# Altium PCB 1.PcbDoc (part 1 of 3)
Units mm, origin at the board's own origin, x right, y up, seen from the top; angles counter-clockwise.
Board outline 233.04 x 114.81 mm, 2 copper layers (Top Layer, Bottom Layer); 326 components, 324 nets, 1073 pads, 126 vias.
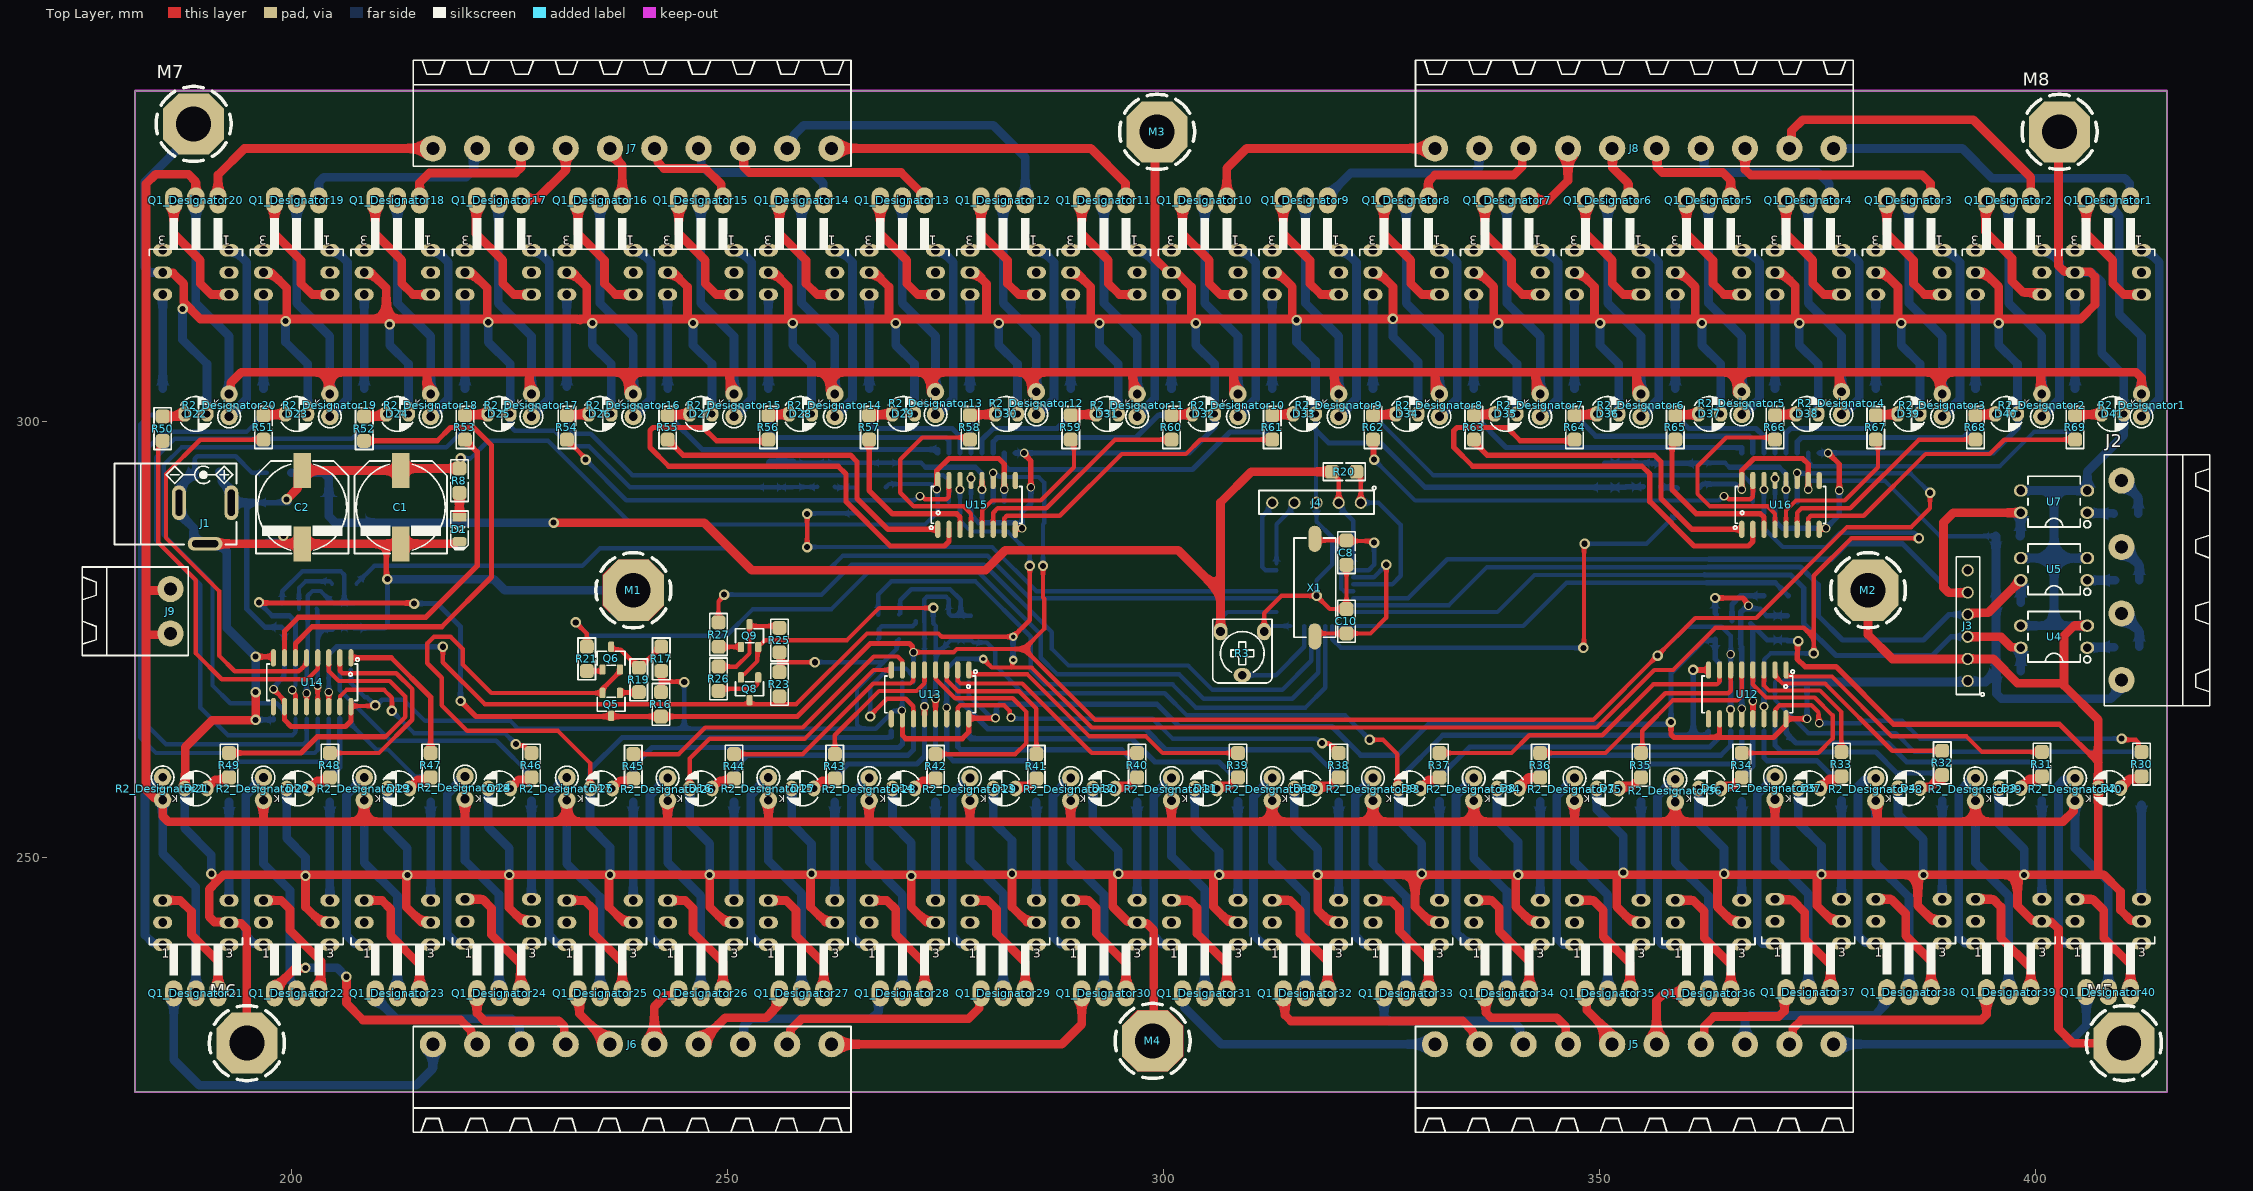
[diagram p0: Top Layer view]
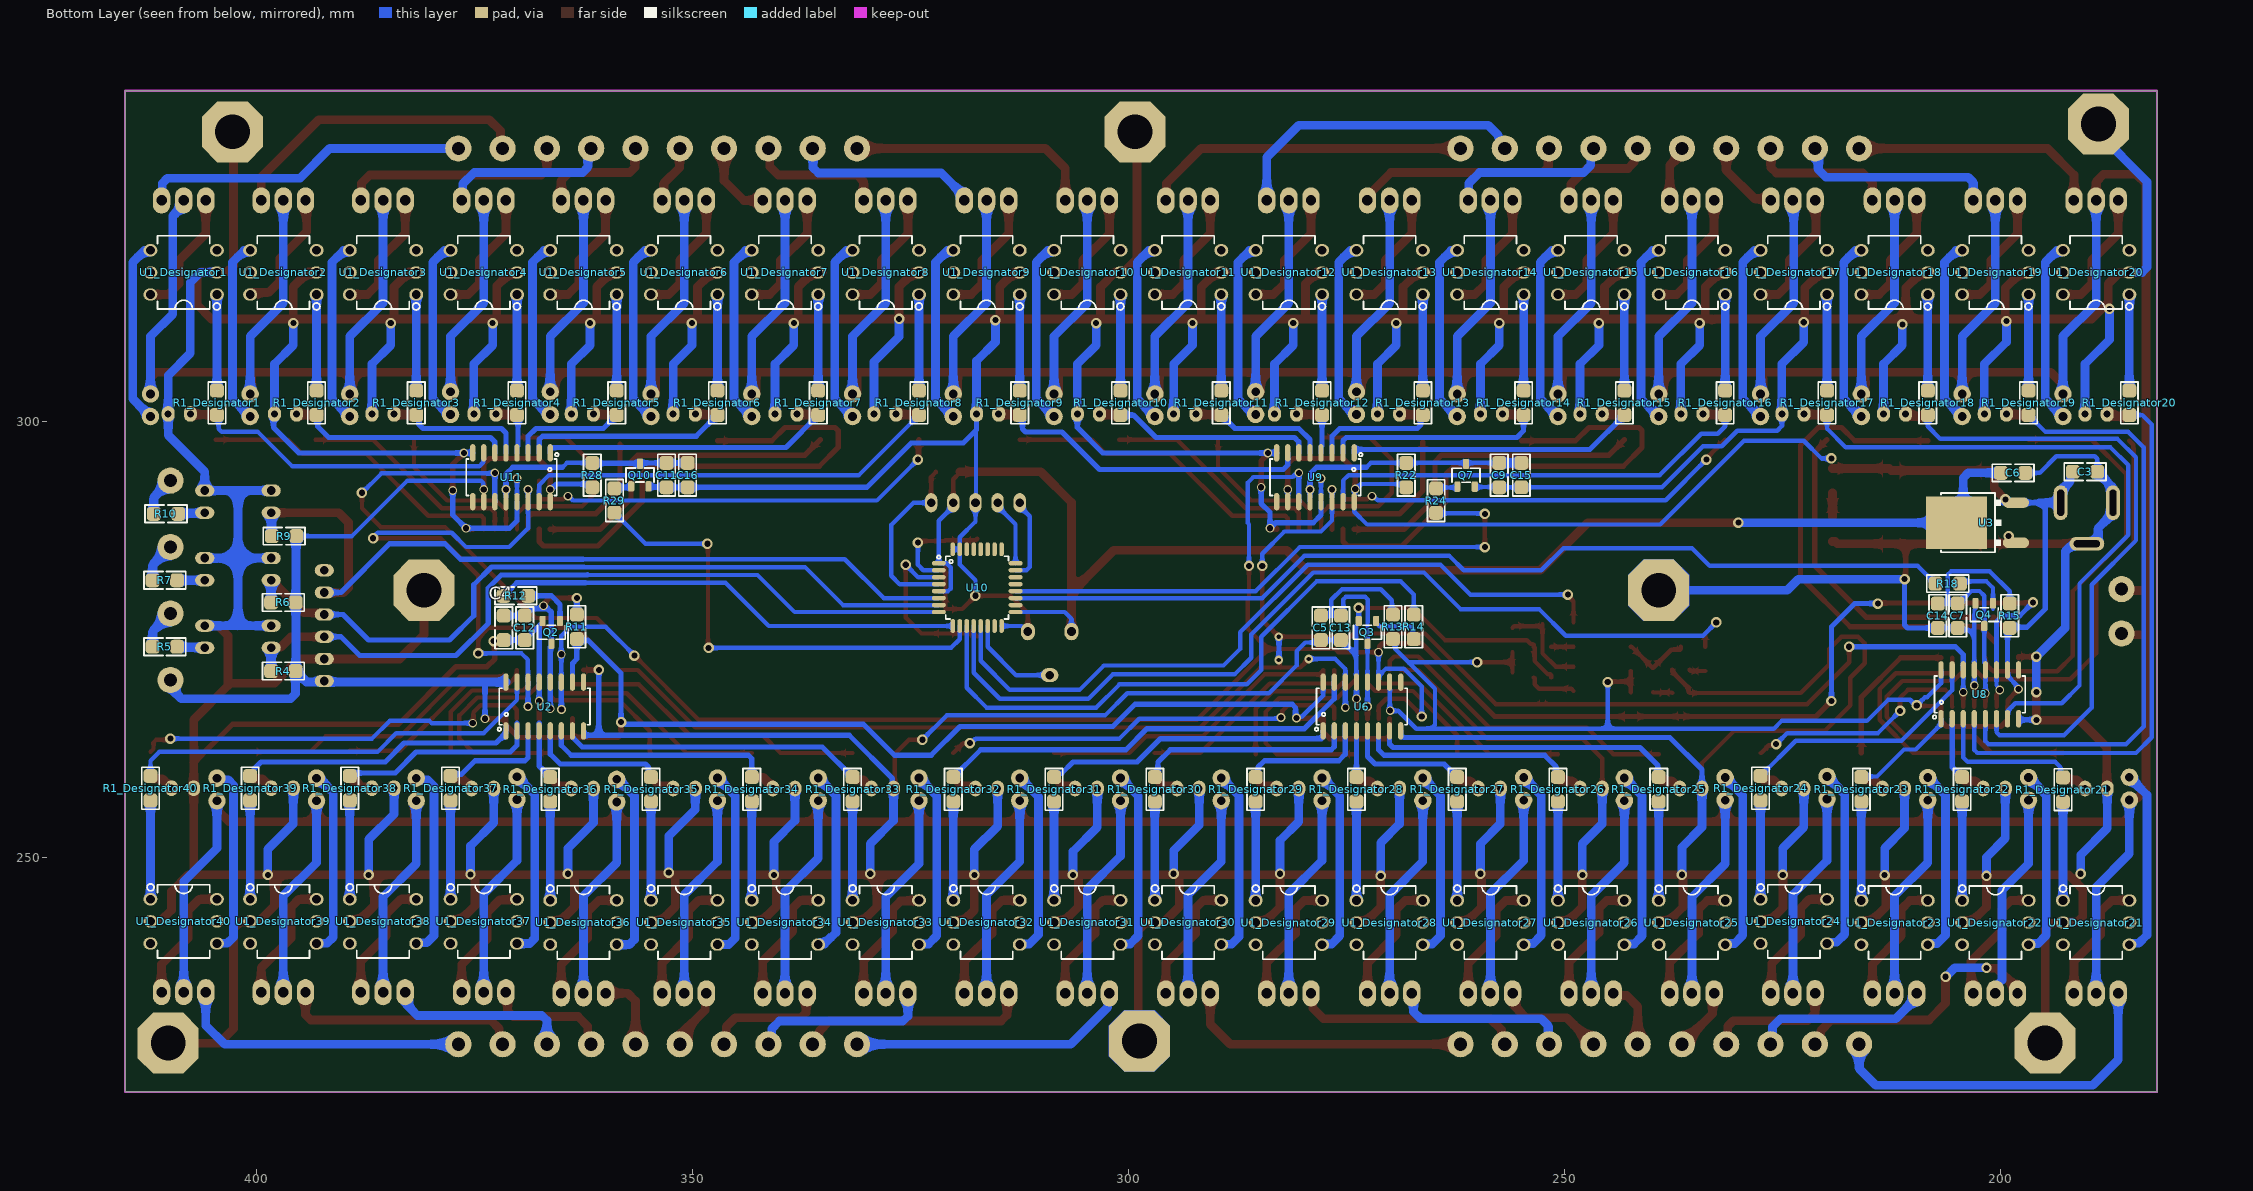
[diagram p1: Bottom Layer view, seen from below]

## Layer stack, top to bottom
Top Solder: solder mask 0.0102, Solder Resist, Dk 3.5
Top Layer: signal copper 0.0356
Dielectric 1: dielectric 0.32, FR-4, Dk 4.8
Bottom Layer: signal copper 0.0356
Bottom Solder: solder mask 0.0102, Solder Resist, Dk 3.5

## Board outline
181.991,223.139 181.991,337.947 415.036,337.947 415.036,223.139

## Design rules (kind name [scope] priority, off if disabled: settings)
Clearance [All] p1: gap=0.3 ignorepadtopadclearanceinfootprint=FALSE
PolygonConnect [All] p1: connectstyle=Relief reliefconductorwidth=0.254 reliefentries=4 polygonreliefangle="90 Angle" airgapwidth=0.254
RoutingVias [All] p1: holewidth=0.5 width=1 viastyle="Through Hole" minholewidth=0.5 minwidth=1 maxholewidth=0.5 maxwidth=1
SolderMaskExpansion [All] p1: expansion=0.102 istentingtop=FALSE
SupplyNets "Schematic Supply Nets_2" [InNet('+5')] p1: voltage=0.000
SupplyNets "Schematic Supply Nets_1" [InNet('GND')] p2: voltage=0.000
SupplyNets "Schematic Supply Nets" [InNet('3.3V')] p3: voltage=0.000
Width [All] p1: maxlimit=1 minlimit=0.5 preferedwidth=0.6
30 further rules are at their usual default settings.

## Classes and differential pairs
channel class Channel: Designator1 Designator2 Designator3 Designator4 Designator5 Designator6 Designator7 Designator8 Designator9 Designator10 Designator11 Designator12 Designator13 Designator14 Designator15 Designator16 Designator17 Designator18 Designator19 Designator20 Designator21 Designator22 Designator23 Designator24 Designator25 Designator26 Designator27 Designator28 Designator29 Designator30 Designator31 Designator32 Designator33 Designator34 Designator35 Designator36 Designator37 Designator38 Designator39 Designator40
component class MainSchematic: C1 C2 C3 C4 C5 C6 C7 C8 C9 C10 C11 C12 C13 C14 C15 C16 D1 D2 D3 D4 D5 D6 D7 D8 D9 D10 D11 D12 D13 D14 D15 D16 D17 D18 D19 D20 D21 D22 D23 D24 D25 D26 D27 D28 D29 D30 D31 D32 D33 D34 D35 D36 D37 D38 D39 D40 D41 J1 J2 J3 J4 J5 J6 J7 J8 J9 M1 M2 M3 M4 M5 M6 M7 M8 Q2 Q3 Q4 Q5 Q6 Q7 Q8 Q9 Q10 R3 R4 R5 R6 R7 R8 R9 R10 R11 R12 R13 R14 R15 R16 R17 R18 R19 R20 R21 R22 R23 R24 R25 R26 R27 R28 R29 R30 R31 R32 R33 R34 R35 R36 R37 R38 R39 R40 R41 R42 R43 R44 R45 R46 R47 R48 R49 R50 R51 R52 R53 R54 R55 R56 R57 R58 R59 R60 R61 R62 R63 R64 R65 R66 R67 R68 R69 tp U2 U3 U4 U5 U6 U7 U8 U9 U10 U11 U12 U13 U14 U15 U16 X1
component class Designator40: Q1_Designator40 R1_Designator40 R2_Designator40 U1_Designator40
component class Designator39: Q1_Designator39 R1_Designator39 R2_Designator39 U1_Designator39
component class Designator38: Q1_Designator38 R1_Designator38 R2_Designator38 U1_Designator38
component class Designator37: Q1_Designator37 R1_Designator37 R2_Designator37 U1_Designator37
component class Designator36: Q1_Designator36 R1_Designator36 R2_Designator36 U1_Designator36
component class Designator35: Q1_Designator35 R1_Designator35 R2_Designator35 U1_Designator35
component class Designator34: Q1_Designator34 R1_Designator34 R2_Designator34 U1_Designator34
component class Designator33: Q1_Designator33 R1_Designator33 R2_Designator33 U1_Designator33
component class Designator32: Q1_Designator32 R1_Designator32 R2_Designator32 U1_Designator32
component class Designator31: Q1_Designator31 R1_Designator31 R2_Designator31 U1_Designator31
component class Designator30: Q1_Designator30 R1_Designator30 R2_Designator30 U1_Designator30
component class Designator29: Q1_Designator29 R1_Designator29 R2_Designator29 U1_Designator29
component class Designator28: Q1_Designator28 R1_Designator28 R2_Designator28 U1_Designator28
component class Designator27: Q1_Designator27 R1_Designator27 R2_Designator27 U1_Designator27
component class Designator26: Q1_Designator26 R1_Designator26 R2_Designator26 U1_Designator26
component class Designator25: Q1_Designator25 R1_Designator25 R2_Designator25 U1_Designator25
component class Designator24: Q1_Designator24 R1_Designator24 R2_Designator24 U1_Designator24
component class Designator23: Q1_Designator23 R1_Designator23 R2_Designator23 U1_Designator23
component class Designator22: Q1_Designator22 R1_Designator22 R2_Designator22 U1_Designator22
component class Designator21: Q1_Designator21 R1_Designator21 R2_Designator21 U1_Designator21
component class Designator20: Q1_Designator20 R1_Designator20 R2_Designator20 U1_Designator20
component class Designator19: Q1_Designator19 R1_Designator19 R2_Designator19 U1_Designator19
component class Designator18: Q1_Designator18 R1_Designator18 R2_Designator18 U1_Designator18
component class Designator17: Q1_Designator17 R1_Designator17 R2_Designator17 U1_Designator17
component class Designator16: Q1_Designator16 R1_Designator16 R2_Designator16 U1_Designator16
component class Designator15: Q1_Designator15 R1_Designator15 R2_Designator15 U1_Designator15
component class Designator14: Q1_Designator14 R1_Designator14 R2_Designator14 U1_Designator14
component class Designator13: Q1_Designator13 R1_Designator13 R2_Designator13 U1_Designator13
component class Designator12: Q1_Designator12 R1_Designator12 R2_Designator12 U1_Designator12
component class Designator11: Q1_Designator11 R1_Designator11 R2_Designator11 U1_Designator11
component class Designator10: Q1_Designator10 R1_Designator10 R2_Designator10 U1_Designator10
component class Designator9: Q1_Designator9 R1_Designator9 R2_Designator9 U1_Designator9
component class Designator8: Q1_Designator8 R1_Designator8 R2_Designator8 U1_Designator8
component class Designator7: Q1_Designator7 R1_Designator7 R2_Designator7 U1_Designator7
component class Designator6: Q1_Designator6 R1_Designator6 R2_Designator6 U1_Designator6
component class Designator5: Q1_Designator5 R1_Designator5 R2_Designator5 U1_Designator5
component class Designator4: Q1_Designator4 R1_Designator4 R2_Designator4 U1_Designator4
component class Designator3: Q1_Designator3 R1_Designator3 R2_Designator3 U1_Designator3
component class Designator2: Q1_Designator2 R1_Designator2 R2_Designator2 U1_Designator2
component class Designator1: Q1_Designator1 R1_Designator1 R2_Designator1 U1_Designator1

## Components (designator, comment, footprint, x,y, rotation, side; value= is the part's Value field where it differs from the comment)
C1 "1000uF" C_EL_D10L9 212.471,290.195 r270 top
C2 "1000uF" C_EL_D10L9 201.168,290.195 r270 top
C3 "100nF" C1206 190.246,294.259 r0 bottom
C4 "CAP SMD PACKAGE" C1206 371.602,276.352 r90 bottom value=100nF
C5 "CAP SMD PACKAGE" C1206 277.876,276.352 r90 bottom value=100nF
C6 "100nF" C1206 198.501,294.132 r0 bottom
C7 "CAP SMD PACKAGE" C1206 204.851,277.749 r90 bottom value=100nF
C8 "20pF" C1206 320.929,284.988 r270 top
C9 "CAP SMD PACKAGE" C1206 257.429,293.878 r90 bottom value=100nF
C10 "20pF" C1206 320.929,277.114 r90 top
C11 "CAP SMD PACKAGE" C1206 352.933,293.878 r90 bottom value=100nF
C12 "CAP SMD PACKAGE" C1206 369.189,276.352 r90 bottom value=100nF
C13 "CAP SMD PACKAGE" C1206 275.59,276.352 r90 bottom value=100nF
C14 "CAP SMD PACKAGE" C1206 207.137,277.749 r90 bottom value=100nF
C15 "CAP SMD PACKAGE" C1206 254.889,293.881 r90 bottom value=100nF
C16 "CAP SMD PACKAGE" C1206 350.52,293.878 r90 bottom value=100nF
D1 "LED1206YLW" LED1206YLW 219.202,287.655 r270 top
D2 "LED3MM" LED3MM 408.432,257.967 r180 top
D3 "LED3MM" LED3MM 397.002,257.967 r180 top
D4 "LED3MM" LED3MM 385.445,257.967 r180 top
D5 "LED3MM" LED3MM 374.015,257.937 r180 top
D6 "LED3MM" LED3MM 362.585,257.937 r180 top
D7 "LED3MM" LED3MM 350.901,257.937 r180 top
D8 "LED3MM" LED3MM 339.471,257.937 r180 top
D9 "=VALUE" LED3MM 328.168,257.937 r180 top
D10 "LED3MM" LED3MM 316.23,257.937 r180 top
D11 "LED3MM" LED3MM 304.8,257.937 r180 top
D12 "LED3MM" LED3MM 293.116,257.937 r180 top
D13 "LED3MM" LED3MM 281.686,257.937 r180 top
D14 "LED3MM" LED3MM 270.129,257.937 r180 top
D15 "LED3MM" LED3MM 258.572,257.937 r180 top
D16 "LED3MM" LED3MM 246.888,257.937 r180 top
D17 "=VALUE" LED3MM 235.458,257.937 r180 top
D18 "LED3MM" LED3MM 223.774,257.937 r180 top
D19 "LED3MM" LED3MM 212.217,257.937 r180 top
D20 "LED3MM" LED3MM 200.66,257.937 r180 top
D21 "LED3MM" LED3MM 188.976,257.937 r180 top
D22 "LED3MM" LED3MM 188.976,300.896 r0 top
D23 "LED3MM" LED3MM 200.533,300.896 r0 top
D24 "LED3MM" LED3MM 212.09,300.896 r0 top
D25 "=VALUE" LED3MM 223.748,300.896 r0 top
D26 "LED3MM" LED3MM 235.331,300.896 r0 top
D27 "LED3MM" LED3MM 246.888,300.896 r0 top
D28 "LED3MM" LED3MM 258.318,300.896 r0 top
D29 "LED3MM" LED3MM 270.129,300.896 r0 top
D30 "LED3MM" LED3MM 281.94,300.896 r0 top
D31 "LED3MM" LED3MM 293.497,300.896 r0 top
D32 "LED3MM" LED3MM 304.546,300.896 r0 top
D33 "=VALUE" LED3MM 316.103,300.896 r0 top
D34 "LED3MM" LED3MM 327.877,300.896 r0 top
D35 "LED3MM" LED3MM 339.217,300.896 r0 top
D36 "LED3MM" LED3MM 350.901,300.896 r0 top
D37 "LED3MM" LED3MM 362.585,300.896 r0 top
D38 "LED3MM" LED3MM 373.761,300.896 r0 top
D39 "LED3MM" LED3MM 385.445,300.896 r0 top
D40 "LED3MM" LED3MM 396.621,300.896 r0 top
D41 "LED3MM" LED3MM 408.813,300.896 r0 top
J1 "DC_POWER_JACK" JAC_PWR2 193.04,290.703 r90 top
J2 "CONN_GMSTB4" GMSTB762_4 409.829,281.813 r270 top
J3 "HDRF6" HDR_F_1X6 392.176,276.606 r90 top
J4 "HDRF5" HDR_F_1X5 317.5,290.703 r180 top
J5 "CONN_TB10" MSTB_10 353.949,228.6 r180 top
J6 "CONN_TB10" MSTB_10 239.014,228.6 r180 top
J7 "CONN_TB10" MSTB_10 239.014,331.343 r0 top locked
J8 "CONN_TB10" MSTB_10 353.949,331.343 r0 top locked
J9 "CONN_TB2" MSTB_2 186.055,278.257 r90 top
M1 "DNP/MH" SCMH_M5FT#1 239.141,280.67 r0 top locked
M2 "DNP/MH" SCMH_M5FT#2 380.746,280.67 r0 top locked
M3 "DNP/MH" SCMH_M5FT#2 299.212,333.248 r0 top
M4 "DNP/MH" SCMH_M5FT#1 298.704,228.981 r0 top locked
M5 "DNP/MH" SCMH_M5FT#2 410.083,228.727 r0 top
M6 "DNP/MH" SCMH_M5FT#2 194.818,228.727 r0 top
M7 "DNP/MH" SCMH_M5FT#2 188.722,334.148 r0 top
M8 "DNP/MH" SCMH_M5FT#2 402.717,333.248 r0 top
Q1_Designator1 "BT136" TO220_3B 408.305,325.374 r180 top (schematic designator Q1)
Q1_Designator2 "BT136" TO220_3B 396.875,325.374 r180 top (schematic designator Q1)
Q1_Designator3 "BT136" TO220_3B 385.445,325.374 r180 top (schematic designator Q1)
Q1_Designator4 "BT136" TO220_3B 373.888,325.374 r180 top (schematic designator Q1)
Q1_Designator5 "BT136" TO220_3B 362.458,325.374 r180 top (schematic designator Q1)
Q1_Designator6 "BT136" TO220_3B 350.901,325.374 r180 top (schematic designator Q1)
Q1_Designator7 "BT136" TO220_3B 339.344,325.374 r180 top (schematic designator Q1)
Q1_Designator8 "BT136" TO220_3B 327.787,325.374 r180 top (schematic designator Q1)
Q1_Designator9 "BT136" TO220_3B 316.23,325.374 r180 top (schematic designator Q1)
Q1_Designator10 "BT136" TO220_3B 304.673,325.374 r180 top (schematic designator Q1)
Q1_Designator11 "BT136" TO220_3B 293.116,325.374 r180 top (schematic designator Q1)
Q1_Designator12 "BT136" TO220_3B 281.559,325.374 r180 top (schematic designator Q1)
Q1_Designator13 "BT136" TO220_3B 270.002,325.374 r180 top (schematic designator Q1)
Q1_Designator14 "BT136" TO220_3B 258.445,325.374 r180 top (schematic designator Q1)
Q1_Designator15 "BT136" TO220_3B 246.888,325.374 r180 top (schematic designator Q1)
Q1_Designator16 "BT136" TO220_3B 235.331,325.374 r180 top (schematic designator Q1)
Q1_Designator17 "BT136" TO220_3B 223.748,325.374 r180 top (schematic designator Q1)
Q1_Designator18 "BT136" TO220_3B 212.09,325.374 r180 top (schematic designator Q1)
Q1_Designator19 "BT136" TO220_3B 200.533,325.374 r180 top (schematic designator Q1)
Q1_Designator20 "BT136" TO220_3B 188.976,325.374 r180 top (schematic designator Q1)
Q1_Designator21 "BT136" TO220_3B 188.976,234.442 r0 top (schematic designator Q1)
Q1_Designator22 "BT136" TO220_3B 200.533,234.442 r0 top (schematic designator Q1)
Q1_Designator23 "BT136" TO220_3B 212.09,234.442 r0 top (schematic designator Q1)
Q1_Designator24 "BT136" TO220_3B 223.748,234.468 r0 top (schematic designator Q1)
Q1_Designator25 "BT136" TO220_3B 235.331,234.442 r0 top (schematic designator Q1)
Q1_Designator26 "BT136" TO220_3B 246.888,234.442 r0 top (schematic designator Q1)
Q1_Designator27 "BT136" TO220_3B 258.445,234.442 r0 top (schematic designator Q1)
Q1_Designator28 "BT136" TO220_3B 270.002,234.442 r0 top (schematic designator Q1)
Q1_Designator29 "BT136" TO220_3B 281.559,234.442 r0 top (schematic designator Q1)
Q1_Designator30 "BT136" TO220_3B 293.116,234.442 r0 top (schematic designator Q1)
Q1_Designator31 "BT136" TO220_3B 304.673,234.442 r0 top (schematic designator Q1)
Q1_Designator32 "BT136" TO220_3B 316.23,234.442 r0 top (schematic designator Q1)
Q1_Designator33 "BT136" TO220_3B 327.787,234.442 r0 top (schematic designator Q1)
Q1_Designator34 "BT136" TO220_3B 339.344,234.442 r0 top (schematic designator Q1)
Q1_Designator35 "BT136" TO220_3B 350.901,234.442 r0 top (schematic designator Q1)
Q1_Designator36 "BT136" TO220_3B 362.458,234.442 r0 top (schematic designator Q1)
Q1_Designator37 "BT136" TO220_3B 373.888,234.569 r0 top (schematic designator Q1)
Q1_Designator38 "BT136" TO220_3B 385.445,234.569 r0 top (schematic designator Q1)
Q1_Designator39 "BT136" TO220_3B 396.875,234.569 r0 top (schematic designator Q1)
Q1_Designator40 "BT136" TO220_3B 408.305,234.581 r0 top (schematic designator Q1)
Q2 "BC847" SOT23_3 366.141,275.844 r270 bottom
Q3 "BC847" SOT23_3 272.542,275.844 r270 bottom
Q4 "BC847" SOT23_3 201.803,277.876 r270 bottom
Q5 "BC847" SOT23_3 236.601,267.589 r270 top
Q6 "BC847" SOT23_3 236.601,272.879 r90 top
Q7 "BC847" SOT23_3 261.239,293.848 r90 bottom
Q8 "BC847" SOT23_3 252.476,269.367 r270 top
Q9 "BC847" SOT23_3 252.476,275.463 r90 top
Q10 "BC847" SOT23_3 355.981,293.878 r90 bottom
R1_Designator1 "330K" R1206 404.495,302.167 r270 bottom (schematic designator R1)
R1_Designator2 "330K" R1206 393.065,302.167 r270 bottom (schematic designator R1)
R1_Designator3 "330K" R1206 381.635,302.167 r270 bottom (schematic designator R1)
R1_Designator4 "330K" R1206 370.078,302.167 r270 bottom (schematic designator R1)
R1_Designator5 "330K" R1206 358.648,302.167 r270 bottom (schematic designator R1)
R1_Designator6 "330K" R1206 347.091,302.167 r270 bottom (schematic designator R1)
R1_Designator7 "330K" R1206 335.534,302.167 r270 bottom (schematic designator R1)
R1_Designator8 "330K" R1206 323.977,302.167 r270 bottom (schematic designator R1)
R1_Designator9 "330K" R1206 312.42,302.167 r270 bottom (schematic designator R1)
R1_Designator10 "330K" R1206 300.863,302.167 r270 bottom (schematic designator R1)
R1_Designator11 "330K" R1206 289.306,302.167 r270 bottom (schematic designator R1)
R1_Designator12 "330K" R1206 277.749,302.167 r270 bottom (schematic designator R1)
R1_Designator13 "330K" R1206 266.192,302.167 r270 bottom (schematic designator R1)
R1_Designator14 "330K" R1206 254.635,302.167 r270 bottom (schematic designator R1)
R1_Designator15 "330K" R1206 243.078,302.167 r270 bottom (schematic designator R1)
R1_Designator16 "330K" R1206 231.521,302.167 r270 bottom (schematic designator R1)
R1_Designator17 "330K" R1206 219.837,302.167 r270 bottom (schematic designator R1)
R1_Designator18 "330K" R1206 208.28,302.167 r270 bottom (schematic designator R1)
R1_Designator19 "330K" R1206 196.723,302.167 r270 bottom (schematic designator R1)
R1_Designator20 "330K" R1206 185.166,302.167 r270 bottom (schematic designator R1)
R1_Designator21 "330K" R1206 192.786,257.81 r90 bottom (schematic designator R1)
R1_Designator22 "330K" R1206 204.343,257.84 r90 bottom (schematic designator R1)
R1_Designator23 "330K" R1206 215.9,257.84 r90 bottom (schematic designator R1)
R1_Designator24 "330K" R1206 227.457,257.967 r90 bottom (schematic designator R1)
R1_Designator25 "330K" R1206 239.141,257.84 r90 bottom (schematic designator R1)
R1_Designator26 "330K" R1206 250.698,257.84 r90 bottom (schematic designator R1)
R1_Designator27 "330K" R1206 262.255,257.84 r90 bottom (schematic designator R1)
R1_Designator28 "330K" R1206 273.812,257.84 r90 bottom (schematic designator R1)
R1_Designator29 "330K" R1206 285.369,257.84 r90 bottom (schematic designator R1)
R1_Designator30 "330K" R1206 296.926,257.84 r90 bottom (schematic designator R1)
R1_Designator31 "330K" R1206 308.483,257.84 r90 bottom (schematic designator R1)
R1_Designator32 "330K" R1206 320.04,257.84 r90 bottom (schematic designator R1)
R1_Designator33 "330K" R1206 331.597,257.84 r90 bottom (schematic designator R1)
R1_Designator34 "330K" R1206 343.154,257.84 r90 bottom (schematic designator R1)
R1_Designator35 "330K" R1206 354.711,257.84 r90 bottom (schematic designator R1)
R1_Designator36 "330K" R1206 366.268,257.84 r90 bottom (schematic designator R1)
R1_Designator37 "330K" R1206 377.698,257.967 r90 bottom (schematic designator R1)
R1_Designator38 "330K" R1206 389.255,257.967 r90 bottom (schematic designator R1)
R1_Designator39 "330K" R1206 400.685,257.967 r90 bottom (schematic designator R1)
R1_Designator40 "330K" R1206 412.115,257.967 r90 bottom (schematic designator R1)
R2_Designator1 "300" R025W_AX_VER 412.115,301.888 r90 top (schematic designator R2)
R2_Designator2 "300" R025W_AX_VER 400.685,301.888 r90 top (schematic designator R2)
R2_Designator3 "300" R025W_AX_VER 389.255,301.888 r90 top (schematic designator R2)
R2_Designator4 "300" R025W_AX_VER 377.698,302.133 r90 top (schematic designator R2)
R2_Designator5 "300" R025W_AX_VER 366.268,302.133 r90 top (schematic designator R2)
R2_Designator6 "300" R025W_AX_VER 354.711,301.888 r90 top (schematic designator R2)
R2_Designator7 "300" R025W_AX_VER 343.154,301.888 r90 top (schematic designator R2)
R2_Designator8 "300" R025W_AX_VER 331.597,301.888 r90 top (schematic designator R2)
R2_Designator9 "300" R025W_AX_VER 320.04,301.888 r90 top (schematic designator R2)
R2_Designator10 "300" R025W_AX_VER 308.483,301.888 r90 top (schematic designator R2)
R2_Designator11 "300" R025W_AX_VER 296.926,301.888 r90 top (schematic designator R2)
R2_Designator12 "300" R025W_AX_VER 285.369,302.133 r90 top (schematic designator R2)
R2_Designator13 "300" R025W_AX_VER 273.812,302.133 r90 top (schematic designator R2)
R2_Designator14 "300" R025W_AX_VER 262.255,301.888 r90 top (schematic designator R2)
R2_Designator15 "300" R025W_AX_VER 250.698,301.888 r90 top (schematic designator R2)
R2_Designator16 "300" R025W_AX_VER 239.141,301.888 r90 top (schematic designator R2)
R2_Designator17 "300" R025W_AX_VER 227.457,301.888 r90 top (schematic designator R2)
R2_Designator18 "300" R025W_AX_VER 215.9,301.888 r90 top (schematic designator R2)
R2_Designator19 "300" R025W_AX_VER 204.343,301.888 r90 top (schematic designator R2)
R2_Designator20 "300" R025W_AX_VER 192.786,301.888 r90 top (schematic designator R2)
R2_Designator21 "300" R025W_AX_VER 185.166,257.918 r270 top (schematic designator R2)
R2_Designator22 "300" R025W_AX_VER 196.723,257.893 r270 top (schematic designator R2)
R2_Designator23 "300" R025W_AX_VER 208.28,257.893 r270 top (schematic designator R2)
R2_Designator24 "300" R025W_AX_VER 219.837,258.02 r270 top (schematic designator R2)
R2_Designator25 "300" R025W_AX_VER 231.521,257.893 r270 top (schematic designator R2)
R2_Designator26 "300" R025W_AX_VER 243.078,257.84 r270 top (schematic designator R2)
R2_Designator27 "300" R025W_AX_VER 254.635,257.893 r270 top (schematic designator R2)
R2_Designator28 "300" R025W_AX_VER 266.192,257.84 r270 top (schematic designator R2)
R2_Designator29 "300" R025W_AX_VER 277.749,257.84 r270 top (schematic designator R2)
R2_Designator30 "300" R025W_AX_VER 289.306,257.84 r270 top (schematic designator R2)
R2_Designator31 "300" R025W_AX_VER 300.863,257.84 r270 top (schematic designator R2)
R2_Designator32 "300" R025W_AX_VER 312.42,257.84 r270 top (schematic designator R2)
R2_Designator33 "300" R025W_AX_VER 323.977,257.84 r270 top (schematic designator R2)
R2_Designator34 "300" R025W_AX_VER 335.534,257.84 r270 top (schematic designator R2)
R2_Designator35 "300" R025W_AX_VER 347.091,257.84 r270 top (schematic designator R2)
R2_Designator36 "300" R025W_AX_VER 358.648,257.683 r270 top (schematic designator R2)
R2_Designator37 "300" R025W_AX_VER 370.078,257.967 r270 top (schematic designator R2)
R2_Designator38 "300" R025W_AX_VER 381.635,257.823 r270 top (schematic designator R2)
R2_Designator39 "300" R025W_AX_VER 393.065,257.823 r270 top (schematic designator R2)
R2_Designator40 "300" R025W_AX_VER 404.495,257.823 r270 top (schematic designator R2)
R3 "POT10K" POT_7X5 308.991,273.431 r180 top
R4 "4.7k" R1206 396.875,271.399 r0 bottom
R5 "330" R1206 410.464,274.193 r180 bottom
R6 "4.7k" R1206 396.875,279.273 r0 bottom
R7 "330" R1206 410.464,281.813 r0 bottom
R8 "330" R1206 219.202,293.243 r90 top
R9 "4.7k" R1206 396.789,286.879 r0 bottom
R10 "330" R1206 410.337,289.433 r0 bottom
R11 "4.7K" R1206 363.22,276.479 r90 bottom
R12 "1K" R1206 370.205,280.035 r0 bottom
R13 "4.7K" R1206 269.621,276.482 r90 bottom
R14 "1k" R1206 267.233,276.478 r90 bottom
R15 "4.7K" R1206 198.882,277.749 r90 bottom
R16 "4.7k" R1206 242.316,267.586 r270 top
R17 "4.7k" R1206 242.348,272.807 r90 top
R18 "1k" R1206 205.994,281.432 r0 bottom
R19 "1k" R1206 239.776,270.383 r90 top
R20 "10K" R1206 320.675,294.259 r180 top
R21 "1k" R1206 233.807,272.807 r90 top
R22 "4.7K" R1206 268.097,293.878 r90 bottom
R23 "4.7k" R1206 255.905,269.878 r270 top
R24 "1k" R1206 264.668,290.954 r270 bottom
R25 "4.7k" R1206 255.905,274.955 r90 top
R26 "1k" R1206 248.92,270.513 r90 top
R27 "1k" R1206 248.92,275.59 r90 top
R28 "4.7K" R1206 361.442,293.878 r90 bottom
R29 "1k" R1206 358.902,290.96 r270 bottom
R30 "1k" R1206 412.115,260.731 r90 top
R31 "1k" R1206 400.685,260.731 r90 top
R32 "1k" R1206 389.255,260.861 r90 top
R33 "1k" R1206 377.698,260.731 r90 top
R34 "1k" R1206 366.268,260.604 r90 top
R35 "1k" R1206 354.711,260.604 r90 top
R36 "1k" R1206 343.154,260.601 r90 top
R37 "=VALUE" R1206 331.597,260.601 r90 top
R38 "1k" R1206 320.04,260.604 r90 top
R39 "1k" R1206 308.483,260.604 r90 top
R40 "1k" R1206 296.926,260.604 r90 top
R41 "1k" R1206 285.369,260.477 r90 top
R42 "1k" R1206 273.812,260.477 r90 top
R43 "1k" R1206 262.255,260.48 r90 top
R44 "1k" R1206 250.698,260.48 r90 top
R45 "1k" R1206 239.141,260.48 r90 top
R46 "1k" R1206 227.457,260.607 r90 top
R47 "1k" R1206 215.9,260.604 r90 top
R48 "1k" R1206 204.343,260.604 r90 top
R49 "1k" R1206 192.786,260.604 r90 top
R50 "1k" R1206 185.166,299.209 r270 top
R51 "1k" R1206 196.723,299.339 r270 top
R52 "1k" R1206 208.28,299.209 r270 top
R53 "1k" R1206 219.837,299.339 r270 top
R54 "1k" R1206 231.521,299.339 r270 top
R55 "1k" R1206 243.078,299.339 r270 top
R56 "1k" R1206 254.635,299.339 r270 top
R57 "1k" R1206 266.192,299.339 r270 top
R58 "1k" R1206 277.749,299.339 r270 top
R59 "1k" R1206 289.306,299.339 r270 top
R60 "1k" R1206 300.863,299.339 r270 top
R61 "1k" R1206 312.42,299.339 r270 top
R62 "1k" R1206 323.977,299.339 r270 top
R63 "1k" R1206 335.534,299.339 r270 top
R64 "1k" R1206 347.091,299.339 r270 top
R65 "1k" R1206 358.648,299.339 r270 top
R66 "1k" R1206 370.078,299.339 r270 top
R67 "1k" R1206 381.635,299.339 r270 top
R68 "1k" R1206 393.065,299.339 r270 top
R69 "1k" R1206 404.495,299.339 r270 top
U1_Designator1 "MOC3061" DIP_6 408.305,317.119 r0 bottom (schematic designator U1)
U1_Designator2 "MOC3061" DIP_6 396.875,317.119 r0 bottom (schematic designator U1)
U1_Designator3 "MOC3061" DIP_6 385.445,317.119 r0 bottom (schematic designator U1)
U1_Designator4 "MOC3061" DIP_6 373.888,317.119 r0 bottom (schematic designator U1)
U1_Designator5 "MOC3061" DIP_6 362.458,317.119 r0 bottom (schematic designator U1)
U1_Designator6 "MOC3061" DIP_6 350.901,317.119 r0 bottom (schematic designator U1)
U1_Designator7 "MOC3061" DIP_6 339.344,317.119 r0 bottom (schematic designator U1)
U1_Designator8 "MOC3061" DIP_6 327.787,317.119 r0 bottom (schematic designator U1)
U1_Designator9 "MOC3061" DIP_6 316.23,317.119 r0 bottom (schematic designator U1)
U1_Designator10 "MOC3061" DIP_6 304.673,317.119 r0 bottom (schematic designator U1)
U1_Designator11 "MOC3061" DIP_6 293.116,317.119 r0 bottom (schematic designator U1)
U1_Designator12 "MOC3061" DIP_6 281.559,317.119 r0 bottom (schematic designator U1)
U1_Designator13 "MOC3061" DIP_6 270.002,317.119 r0 bottom (schematic designator U1)
U1_Designator14 "MOC3061" DIP_6 258.445,317.119 r0 bottom (schematic designator U1)
U1_Designator15 "MOC3061" DIP_6 246.888,317.119 r0 bottom (schematic designator U1)
U1_Designator16 "MOC3061" DIP_6 235.331,317.119 r0 bottom (schematic designator U1)
U1_Designator17 "MOC3061" DIP_6 223.647,317.119 r0 bottom (schematic designator U1)
U1_Designator18 "MOC3061" DIP_6 212.09,317.119 r0 bottom (schematic designator U1)
U1_Designator19 "MOC3061" DIP_6 200.533,317.119 r0 bottom (schematic designator U1)
U1_Designator20 "MOC3061" DIP_6 188.976,317.119 r0 bottom (schematic designator U1)
U1_Designator21 "MOC3061" DIP_6 188.976,242.558 r180 bottom (schematic designator U1)
U1_Designator22 "MOC3061" DIP_6 200.533,242.558 r180 bottom (schematic designator U1)
U1_Designator23 "MOC3061" DIP_6 212.09,242.558 r180 bottom (schematic designator U1)
U1_Designator24 "MOC3061" DIP_6 223.647,242.685 r180 bottom (schematic designator U1)
U1_Designator25 "MOC3061" DIP_6 235.331,242.558 r180 bottom (schematic designator U1)
U1_Designator26 "MOC3061" DIP_6 246.888,242.558 r180 bottom (schematic designator U1)
U1_Designator27 "MOC3061" DIP_6 258.445,242.558 r180 bottom (schematic designator U1)
U1_Designator28 "MOC3061" DIP_6 270.002,242.558 r180 bottom (schematic designator U1)
U1_Designator29 "MOC3061" DIP_6 281.559,242.558 r180 bottom (schematic designator U1)
U1_Designator30 "MOC3061" DIP_6 293.116,242.57 r180 bottom (schematic designator U1)
U1_Designator31 "MOC3061" DIP_6 304.673,242.57 r180 bottom (schematic designator U1)
U1_Designator32 "MOC3061" DIP_6 316.23,242.57 r180 bottom (schematic designator U1)
U1_Designator33 "MOC3061" DIP_6 327.787,242.57 r180 bottom (schematic designator U1)
U1_Designator34 "MOC3061" DIP_6 339.344,242.57 r180 bottom (schematic designator U1)
U1_Designator35 "MOC3061" DIP_6 350.901,242.57 r180 bottom (schematic designator U1)
U1_Designator36 "MOC3061" DIP_6 362.458,242.57 r180 bottom (schematic designator U1)
U1_Designator37 "MOC3061" DIP_6 373.888,242.697 r180 bottom (schematic designator U1)
U1_Designator38 "MOC3061" DIP_6 385.445,242.697 r180 bottom (schematic designator U1)
U1_Designator39 "MOC3061" DIP_6 396.875,242.697 r180 bottom (schematic designator U1)
U1_Designator40 "MOC3061" DIP_6 408.305,242.697 r180 bottom (schematic designator U1)
U2 "=VALUE" SO_16 366.903,267.335 r90 bottom
U3 "LD1117" DPAK_3 198.178,288.417 r90 bottom
U4 "PC817" DIP_4 402.082,275.336 r180 top
U5 "PC817" DIP_4 402.082,283.087 r180 top
U6 "=VALUE" SO_16 273.177,267.335 r90 bottom
U7 "PC817" DIP_4 402.082,290.83 r180 top
U8 "74HC595" SO_16 202.311,268.732 r90 bottom
U9 "74HC595" SO_16 278.511,293.624 r270 bottom
U10 "STM32F030" QFG80_32 317.303,280.969 r180 bottom
U11 "=VALUE" SO_16 370.713,293.624 r270 bottom
U12 "=VALUE" SO_16 366.903,268.726 r270 top
U13 "=VALUE" SO_16 273.177,268.726 r270 top
U14 "74HC595" SO_16 202.311,270.123 r270 top
U15 "74HC595" SO_16 278.511,290.455 r90 top
U16 "=VALUE" SO_16 370.713,290.455 r90 top
X1 "XTL_8MHz" XTL_2_11X5 317.303,280.969 r90 top

## Footprints (in the part's own frame and the unit in brackets; to place one, negate y for a bottom-side part, rotate by r counter-clockwise, add the part's x,y. Pads: shape width x height; smd on the part's side, far side on the other; paste and mask are expansions set on the pad)
C1206 [mm] "CHIP Capacitor, 3.2X1.6mm, 1206"
  rrect50% 1.6x1.6 smd paste-0.8 mask+0.075: 1(-1.4,0) 2(1.4,0)
  Top Layer pour cut-out: -0.8,1 -0.8,-1 0.8,-1 0.8,1
  silkscreen extent -2.4,-1 2.4,1, body extent -1.6,-0.8 1.6,0.8, height 1
C_EL_D10L9 [mm] "Electrolytic Cap, 10.3mm, L: 8.7mm"
  rect 4x2 smd paste-0.215: 1(-4.2,0) 2(4.2,0)
  Top Layer pour cut-out: -3.556,5.08 -3.556,-5.08 3.556,-5.08 3.556,5.08
  silkscreen extent -5.3,-5.3 5.3,5.3, body extent -5.5,-5.15 5.5,5.15
DIP_4 [mm] "BRIDGE DIODE, DIP, pitch 2.54mm, 300mil Width"
  oval 1.6x1.4 / inner round 1.4 / far side oval 2.2x1.4 hole 1: 1(-3.81,1.27) 2(-3.81,-1.27) 3(3.81,-1.27) 4(3.81,1.27)
  silkscreen extent -4.2,-2.9 3,3, body extent -4,-2.77 4,2.77, height 4.31
DIP_6 [mm] "DIP, pitch 2.54mm, 300mil Width"
  oval 1.6x1.4 / inner round 1.4 / far side oval 2.2x1.4 hole 1: 1(-3.81,2.54) 2(-3.81,0) 3(-3.81,-2.54) 4(3.81,-2.54) 5(3.81,0) 6(3.81,2.54)
  silkscreen extent -4.2,-4.2 3,4.3, body extent -4,-4.04 4,4.04, height 4.31
DPAK_3 [mm] "D-PAK (TO-252), 3-Pads, Body 6.2x6.7mm"
  oval 1.2x3 smd: 1(-2.3,0) 3(2.3,0)
  rect 6x7 smd paste-5: 4(0,6.8)
  silkscreen extent -3.4,1.63 3.4,8.6, body extent -3.37,-0.5 3.37,9.6, height 2.37
GMSTB762_4 [mm] "PHOENIX, GMSTB 2,5/4-G-7,62, 7.62mm pitch, 4pin"
  round 3 hole 1.5: 1(-11.43,0) 2(-3.81,0) 3(3.81,0) 4(11.43,0)
  silkscreen extent -14.4,-2 14.4,10.1, body extent -14.34,-1.9 14.34,10.1, height 9.1
HDR_F_1X5 [mm] "HEADER FEMALE pitch: 2.54mm"
  round 1.4 / inner round 1.4 / far side oval 1.4x2.2 hole 1 mask+0.1: 1(-5.08,0) 2(-2.54,0) 3(0,0) 4(2.54,0) 5(5.08,0)
  silkscreen extent -6.81,-1.9 6.6,1.3, body extent -6.47,-1.3 6.48,1.2, height 8.5
HDR_F_1X6 [mm] "HEADER FEMALE pitch: 2.54mm"
  round 1.4 / inner round 1.4 / far side oval 1.4x2.2 hole 1 mask+0.1: 1(-6.35,0) 2(-3.81,0) 3(-1.27,0) 4(1.27,0) 5(3.81,0) 6(6.35,0)
  silkscreen extent -8.08,-1.9 7.9,1.3, body extent -7.74,-1.3 7.75,1.2, height 8.5
JAC_PWR2 [mm] "DC POWER JACK, Power Jack KLDX-0202"
  oval 4x1.6 hole 0.8 slot 3 at 0 deg: 1(0,0) 2(0,6)
  oval 1.6x4 hole 0.8 slot 3 at 90 deg: 3(-4.7,3)
  silkscreen extent -4.8,-0.6 4.5,13.4, body extent -4.9,-0.65 4.5,13.85, height 10.8
LED3MM [mm] "LED THD 3MM"
  oval 1.5x1.8 hole 0.8: 1(-1.27,0) 2(1.27,0)
  silkscreen extent -1.73,-2 1.73,2, body extent -1.9,-1.9 1.6,1.9, height 6.5
LED1206YLW [mm] "LED, 1206, YELLOW"
  rect 1x1.6 smd paste-0.2 mask+0.075: 1(-1.4,0)
  rrect50% 1x1.6 smd paste-0.2 mask+0.075: 2(1.4,0)
  Top Layer pour cut-out: -1.1,1.1 -1.1,-1.1 1.1,-1.1 1.1,1.1
  silkscreen extent -2.1,-1 2.3,1, body extent -1.6,-0.8 1.6,0.8, height 0.68
MSTB_2 [mm] "PHOENIX MSTB 2, 5-G, 5.08mm pitch, 2pin"
  round 3 hole 1.5: 1(-2.54,0) 2(2.54,0)
  silkscreen extent -5.08,-2.03 5.08,10.1, body extent -5,-2 5,10, height 8.7
MSTB_10 [mm] "PHOENIX MSTB 2, 5-G, 5.08mm pitch"
  round 3 hole 1.5: 1(-22.86,0) 2(-17.78,0) 3(-12.7,0) 4(-7.62,0) 5(-2.54,0) 6(2.54,0) 7(7.62,0) 8(12.7,0) 9(17.78,0) 10(22.86,0)
  silkscreen extent -25.1,-2.03 25.1,10.1, body extent -25,-2 25,10, height 8.6
POT_7X5 [mm] "POT, TRIM, 7.5X5.0mm, pitch: 5.0mm"
  oval 1.6x2 hole 1: 1(-2.5,-2.5) 3(2.5,-2.5)
  oval 2x1.6 hole 1: 2(0,2.5)
  silkscreen extent -3.4,-3.9 3.4,3.4, body extent -3.25,-3.78 3.25,3.27, height 7
QFG80_32 [mm] "TQFP32, A32 (Cypress), GP32 (Zarlink), MS-026ABA(JEDEC), 7X7mm, 0.8mm"
  oval 1.6x0.5 smd: 1(-4.4,2.8) 2(-4.4,2) 3(-4.4,1.2) 4(-4.4,0.4) 5(-4.4,-0.4) 6(-4.4,-1.2) 7(-4.4,-2) 8(-4.4,-2.8) 17(4.4,-2.8) 18(4.4,-2) 19(4.4,-1.2) 20(4.4,-0.4) 21(4.4,0.4) 22(4.4,1.2) 23(4.4,2) 24(4.4,2.8)
  oval 0.5x1.6 smd: 9(-2.8,-4.4) 10(-2,-4.4) 11(-1.2,-4.4) 12(-0.4,-4.4) 13(0.4,-4.4) 14(1.2,-4.4) 15(2,-4.4) 16(2.8,-4.4) 25(2.8,4.4) 26(2,4.4) 27(1.2,4.4) 28(0.4,4.4) 29(-0.4,4.4) 30(-1.2,4.4) 31(-2,4.4) 32(-2.8,4.4)
  silkscreen extent -4.6,-3.6 3.6,3.7, body extent -4.5,-4.5 4.5,4.5, height 1.6
R025W_AX_VER [mm] "RESISTOR 1/4 WATT, AXIAL0.4"
  round 2 hole 1: 1(-1.3,0) 2(1.3,0)
  silkscreen extent -2.59,-1.3 0.01,1.3, body extent -2.44,-1.15 1.51,1.15, height 9.83
R1206 [mm] "CHIP RESISTOR 1/4 WATT, Body 3.2x1.6mm,1206, 3216"
  rrect50% 1.6x1.6 smd paste-0.8 mask+0.075: 1(-1.4,0) 2(1.4,0)
  Top Layer pour cut-out: -0.8,1 -0.8,-1 0.8,-1 0.8,1
  silkscreen extent -2.4,-1 2.4,1, body extent -1.68,-0.86 1.68,0.86, height 0.85
SCMH_M5FT#1 [mm] "SCREW mouting, M5, 5mm diameter and 10.0mm, FlatHead"
  oct 7x7 hole 4 mask+0.1: 1(0,0)
  Top Layer pour cut-out: 0.001,4.5 -1.721,4.158 -3.181,3.182 -4.157,1.722 -4.499,0 -4.499,0 -4.156,-1.721 -3.181,-3.181 -1.721,-4.156 0.001,-4.498 0.001,-4.498 2.25,-3.896 3.897,-2.249 4.5,0 4.5,0 4.157,1.722 3.182,3.182 1.722,4.157 0.001,4.5
  Top Layer region: -1.75,-3.5 -3.5,-1.75 -3.5,1.75 -1.75,3.5 1.75,3.5 3.5,1.75 3.5,-1.75 1.75,-3.5
  Bottom Layer pour cut-out: 0.001,4.5 -1.721,4.158 -3.181,3.182 -4.157,1.722 -4.499,0 -4.499,0 -4.156,-1.721 -3.181,-3.181 -1.721,-4.156 0.001,-4.498 0.001,-4.498 2.25,-3.896 3.897,-2.249 4.5,0 4.5,0 4.157,1.722 3.182,3.182 1.722,4.157 0.001,4.5
  Bottom Layer region: -1.75,-3.5 -3.5,-1.75 -3.5,1.75 -1.75,3.5 1.75,3.5 3.5,1.75 3.5,-1.75 1.75,-3.5
  silkscreen extent -4.3,-4.3 4.3,4.3
SCMH_M5FT#2 [mm] "SCREW mouting, M5, 5mm diameter and 10.0mm, FlatHead"
  oct 7x7 hole 4 mask+0.1: 1(0,0)
  Top Layer pour cut-out: 0.001,4.5 -1.721,4.158 -3.181,3.182 -4.157,1.722 -4.499,0 -4.499,0 -4.156,-1.721 -3.181,-3.181 -1.721,-4.156 0.001,-4.498 0.001,-4.498 2.25,-3.896 3.897,-2.249 4.5,0 4.5,0 4.157,1.722 3.182,3.182 1.722,4.157 0.001,4.5
  Bottom Layer pour cut-out: 0.001,4.5 -1.721,4.158 -3.181,3.182 -4.157,1.722 -4.499,0 -4.499,0 -4.156,-1.721 -3.181,-3.181 -1.721,-4.156 0.001,-4.498 0.001,-4.498 2.25,-3.896 3.897,-2.249 4.5,0 4.5,0 4.157,1.722 3.182,3.182 1.722,4.157 0.001,4.5
  silkscreen extent -4.3,-4.3 4.3,4.3
SO_16 [mm] "SOP, SOIC, 3.9mm width, 1.27mm pitch,"
  oval 2x0.6 smd: 1(-2.8,4.445) 2(-2.8,3.175) 3(-2.8,1.905) 4(-2.8,0.635) 5(-2.8,-0.635) 6(-2.8,-1.905) 7(-2.8,-3.175) 8(-2.8,-4.445) 9(2.8,-4.445) 10(2.8,-3.175) 11(2.8,-1.905) 12(2.8,-0.635) 13(2.8,0.635) 14(2.8,1.905) 15(2.8,3.175) 16(2.8,4.445)
  silkscreen extent -2.8,-5.2 2.1,5.4, body extent -3.1,-4.95 3.1,4.95, height 1.7
SOT23_3 [mm] "SOT-23, Micro3, MO-178, TO-236AB, MO-193C, SuperSOT3, SC-59, 1.5x3mm, Pitch 1.9mm"
  rrect50% 1.2x0.7 smd paste-0.05 mask+0.1: 1(-1.3,1) 2(-1.3,-1) 3(1.3,0)
  silkscreen extent -0.8,-1.6 0.8,1.6, body extent -1.32,-1.5 1.32,1.5, height 1.08
TO220_3B [mm] "TO-220 3LEAD, pitch: 2.54mm  10x15mm"
  oval 2x3 hole 1.2: 1(-2.54,0) 2(0,0) 3(2.54,0)
  silkscreen extent -5.33,2.03 5.33,6.35, body extent -5,0 5,19.7, height 4.5
XTL_2_11X5 [mm] "SMD crystal resonator, ABL, ABLS, HC-49, HC49 11X4.5MM"
  oval 3x1.5 smd: 1(-5.6,0) 2(5.6,0)
  silkscreen extent -5.7,-2.4 5.7,2.4, body extent -6.4,-2.41 6.4,2.42, height 4.3

## Part data
C1 C2: library part CAP_SMD_EL, "CAP, SMD, ELEC,", ASSEMBLY=ASSEMBLY, DESC=DESCRIPTION, DIST#=MOUSER, MANF=MANF, MANF_P#=MANF_PART#, PARAM=20%, PARAM2=-V, PRICE="10= -$"
C3 C6 C8 C10: library part CAP_SMD_MLCC, "CAP, MLCC", ASSEMBLY=ASSEMBLY, DESC="CAP, MLCC, 1nF, 50V, C0G, 10%, 0402", MANF=Murata, MANF_P#=MANF_PART#, PARAM="C0G, 10%", PARAM2=50V, PRICE="100= 1$"
C4 C5 C7 C9 C11 C12 C13 C14 C15 C16: "TOTAL CAPACITOR SMD PACK", PACKAGE="all package", Category=Capacitor, Designer="Abbas Basereh"
D1: library part LED_SMD_1206_YLW, "LED, SMD, 1206, YELLOW", ASSEMBLY=ASSEMBLY, DESC=DESCRIPTION, MANF=MANF, MANF_P#=MANF_PART#, PARAM2=2.2V, PRICE=36t@Javan
D2 D3 D4 D5 D6 D7 D8 D9 D10 D11 D12 D13 D14 D15 D16 D17 D18 D19 D20 D21 D22 D23 D24 D25 D26 D27 D28 D29 D30 D31 D32 D33 D34 D35 D36 D37 D38 D39 D40 D41: library part LED_THD_3MM, "LED, THD, 3MM, GREEN", ASSEMBLY=ASSEMBLY, DESC=DESCRIPTION, MANF=MANF, MANF_P#=MANF_PART#, PARAM2=2.2V, PRICE=PRICE
J1: library part CONN_PWR_JACKR2, "CONN, PWR JACK DC, PLUG DIAM 2.0MM RA THD", MANF="CUI STACK", MANF_P#="PJ-202A, PJ-002AH, PJ-102AH, KLDX-0202"
J2: library part CONN_GMSTB762_4, "CONN, PHOENIX MSTB, 5-G, 5.08mm pitch", MANF_P#="GMSTB 2,5/4-G-7,62", PARAM=12A, PARAM2=630V
J3: library part HDR_F_1X6, "CONN, HEADER, Female, pitch: 2.54mm, 6POS"
J4: library part HDR_F_1X5, "CONN, HEADER, Female, pitch: 2.54mm, 5POS"
J5 J6 J7 J8: library part CONN_MSTB_10, "CONN, PHOENIX MSTB, 5-G, 5.08mm pitch", PARAM=12A, PARAM2=320V
J9: library part CONN_MSTB_2, "CONN, PHOENIX MSTB, 5-G, 5.08mm pitch", PARAM=12A, PARAM2=320V
M1 M2 M3 M4 M5 M6 M7 M8: library part SCMH_M5FT, "SCREW mouting, M5, 5mm diameter and 10.0mm, FlatHead", ASSEMBLY=DNP
Q1_Designator1 Q1_Designator2 Q1_Designator3 Q1_Designator4 Q1_Designator5 Q1_Designator6 Q1_Designator7 Q1_Designator8 Q1_Designator9 Q1_Designator10 Q1_Designator11 Q1_Designator12 Q1_Designator13 Q1_Designator14 Q1_Designator15 Q1_Designator16 Q1_Designator17 Q1_Designator18 Q1_Designator19 Q1_Designator20 Q1_Designator21 Q1_Designator22 Q1_Designator23 Q1_Designator24 Q1_Designator25 Q1_Designator26 Q1_Designator27 Q1_Designator28 Q1_Designator29 Q1_Designator30 Q1_Designator31 Q1_Designator32 Q1_Designator33 Q1_Designator34 Q1_Designator35 Q1_Designator36 Q1_Designator37 Q1_Designator38 Q1_Designator39 Q1_Designator40: library part TRIAC_BT136-600_TO220, "Triac, 600V, 4A, TO-220", MANF=NXP, MANF_P#="BT136-600D, BT136-600E", PRICE=700toman@PAYA
Q2 Q3 Q4 Q5 Q6 Q7 Q8 Q9 Q10: library part NPN_BC847_SOT23, "BJT, NPN, 45v, 0.1A, SOT23", MANF="NXP, ON", MANF_P#=BC847BLT, PARAM="0.1A, Hfe110~800", PARAM2="45v, 500mW"
R1_Designator1 R1_Designator2 R1_Designator3 R1_Designator4 R1_Designator5 R1_Designator6 R1_Designator7 R1_Designator8 R1_Designator9 R1_Designator10 R1_Designator11 R1_Designator12 R1_Designator13 R1_Designator14 R1_Designator15 R1_Designator16 R1_Designator17 R1_Designator18 R1_Designator19 R1_Designator20 R1_Designator21 R1_Designator22 R1_Designator23 R1_Designator24 R1_Designator25 R1_Designator26 R1_Designator27 R1_Designator28 R1_Designator29 R1_Designator30 R1_Designator31 R1_Designator32 R1_Designator33 R1_Designator34 R1_Designator35 R1_Designator36 R1_Designator37 R1_Designator38 R1_Designator39 R1_Designator40 R4 R5 R6 R7 R8 R9 R10 R11 R12 R13 R14 R15 R16 R17 R18 R19 R20 R21 R22 R23 R24 R25 R26 R27 R28 R29 R30 R31 R32 R33 R34 R35 R36 R37 R38 R39 R40 R41 R42 R43 R44 R45 R46 R47 R48 R49 R50 R51 R52 R53 R54 R55 R56 R57 R58 R59 R60 R61 R62 R63 R64 R65 R66 R67 R68 R69: library part RES_SMD, "RESISTOR, SMD", ASSEMBLY=ASSEMBLY, DESC=DESCRIPTION, DIST#=MOUSER, MANF=-, MANF_P#=-, PARAM=-W, PARAM2=1%, PRICE="100= 0.5$"
R2_Designator1 R2_Designator2 R2_Designator3 R2_Designator4 R2_Designator5 R2_Designator6 R2_Designator7 R2_Designator8 R2_Designator9 R2_Designator10 R2_Designator11 R2_Designator12 R2_Designator13 R2_Designator14 R2_Designator15 R2_Designator16 R2_Designator17 R2_Designator18 R2_Designator19 R2_Designator20 R2_Designator21 R2_Designator22 R2_Designator23 R2_Designator24 R2_Designator25 R2_Designator26 R2_Designator27 R2_Designator28 R2_Designator29 R2_Designator30 R2_Designator31 R2_Designator32 R2_Designator33 R2_Designator34 R2_Designator35 R2_Designator36 R2_Designator37 R2_Designator38 R2_Designator39 R2_Designator40: library part RES_THD, "RESISTOR, THD", ASSEMBLY=ASSEMBLY, DESC=DESCRIPTION, DIST#=MOUSER, MANF="KOA SPEER", MANF_P#=RK73H1ETTP4701F, PARAM=0.063W, PARAM2=1%, PRICE="100= 0.5$"
R3: library part RES_THD_POT_7X5, "RESISTOR, THD, Potentiometer"
U1_Designator1 U1_Designator2 U1_Designator3 U1_Designator4 U1_Designator5 U1_Designator6 U1_Designator7 U1_Designator8 U1_Designator9 U1_Designator10 U1_Designator11 U1_Designator12 U1_Designator13 U1_Designator14 U1_Designator15 U1_Designator16 U1_Designator17 U1_Designator18 U1_Designator19 U1_Designator20 U1_Designator21 U1_Designator22 U1_Designator23 U1_Designator24 U1_Designator25 U1_Designator26 U1_Designator27 U1_Designator28 U1_Designator29 U1_Designator30 U1_Designator31 U1_Designator32 U1_Designator33 U1_Designator34 U1_Designator35 U1_Designator36 U1_Designator37 U1_Designator38 U1_Designator39 U1_Designator40: library part OPT_TRIAC6P_MOC3061, "OPTOTRIAC, 600v/1A, 6v In", PACKAGE=DIP-6, MANF_P#=MOC3061, PARAM="6v/60mA IN/ 600v/1A out", PARAM2="300mW, -40~85°C", PRICE=5t@paya
U2 U6 U8 U9 U11 U12 U13 U14 U15 U16: library part 74HC595_SOP16, "Shift Register, 8-Bit, with 3-State Output Registers", MANF="DIODES, ON, NXP", MANF_P#="74HC595S16, 74HC595DR2G, 74HC595D", PARAM=8mA, PARAM2=2~6VIN
U3: library part VREG_1117_TO252, "REG, Linear, LDO1V, 0.8A, TO-252", MANF="TI, ON, ST", MANF_P#="LM1117, LD1117, NCV1117", PARAM="LDO1V, 0.8A", PARAM2=1.2/1.5/1.8/2.5/2.85/3.3/5V
U4 U5 U7: library part OPTC_TR4P_PC817, "OPTOCOUPLER, TRANSISTOR, 4PIN", PACKAGE=DIP-4, MANF=SHARP, MANF_P#=PC817, PARAM=IF=20mA, PARAM2="VCE = 35V", PRICE=-
U10: library part STM32F030K6T6_QFP32, "MCU, STM32 ARM 32-bit, Cortex-M0, 64 KB Flash, 8 KB RAM, 39 I/Os, LQFP-48", PACKAGE=QFP-48, MANF=ST, MANF_P#=STM32F030K6T6, PARAM="64KB FLASH, 8KB SRAM, -40~85oC"
X1: library part XTL_2_HC49_8MHz_SMD, "Crystal MOST POPULAR ABL HC49 PACKAGE", MANF=ABRACON, MANF_P#=ABLS-8.000MHZ-B4-T, PARAM="8MHz, 18pF, 30PPM, -20~70oC", PRICE=0.3$

## Via types
v1: diameter 1.2, hole 0.7, Top Layer to Bottom Layer, 83 vias
v2: diameter 1, hole 0.7, Top Layer to Bottom Layer, 40 vias
v3: diameter 1, hole 0.5, Top Layer to Bottom Layer, 3 vias

## Nets (pads, with @x,y where several pads share a name; then routed paths per layer and width w, separated by ;. In a path a pad name is that pad's centre, name@x,y a point inside that pad or via, vN(x,y) a via of type N, cw(c..) or ccw(c..) an arc to the next point about the centre after c; other vN are vias at no path point)
3.3V: C6.2 J4.2 R3.3 R20.2 U3.4 U10.1 U10.5 U10.17 | length 170.9
  Top Layer w0.5: R20.2@319.275,294.259 319.275,294.178 320.04,293.413 J4.2@320.04,290.703
  Top Layer w1: v1(229.997,288.417) 247.269,288.417 252.73,282.956 279.527,282.956 281.813,285.242 301.625,285.242 306.491,280.376 ; R3.3@306.491,275.931 306.491,290.743 310.007,294.259 R20.2@319.275,294.259
  Bottom Layer w0.5: R3.3@306.491,275.931 306.491,277.408 307.252,278.169 U10.17@312.903,278.169 ; J4.2@320.04,290.703 320.04,290.303 321.703,288.64 U10.1@321.703,283.769 320.822,283.769 320.353,283.3 320.353,280.862 320.646,280.569 U10.5@321.703,280.569
  Bottom Layer w1: C6.2@199.901,294.132 203.63,294.132 204.216,293.546 204.216,289.179 U3.4@204.978,288.417 v1(229.997,288.417)
+5: C1.1 C2.1 C3.2 J1.1 J2.4 J3.1 R4.1 R6.1 R8.2 R9.1 R11.1 R13.1 R15.1 R16.1 R17.1 R22.1 R23.1 R25.1 R28.1 U2.10 U2.16 U3.3 U6.10 U6.16 U8.10 U8.16 U9.10 U9.16 U11.10 U11.16 U12.10 U12.16 U13.10 U13.16 U14.10 U14.16 U15.10 U15.16 U16.10 U16.16 | length 515.3
  Top Layer w0.5: v2(197.866,269.322) 199.086,268.102 199.086,268.1 199.136,268.05 U14.10@199.136,267.323 ; U14.16@206.756,267.346 206.802,267.393 209.481,267.393 v1(209.55,267.462) ; R16.1@242.316,268.986 242.332,269.002 242.332,270.196 ; R17.1@242.348,271.407 242.332,271.39 242.332,270.196 ; v1(244.983,270.129) 244.916,270.196 242.332,270.196 ; R23.1@255.905,271.278 255.905,272.417 ; R25.1@255.905,273.555 255.905,272.417 ; v1(259.969,272.415) 259.967,272.417 255.905,272.417
  Top Layer w0.6: U14.10@199.136,267.323 199.136,265.811 199.898,265.049 206.121,265.049 206.756,265.684 U14.16@206.756,267.323 ; U13.10@270.002,265.926 270.002,264.033 270.383,263.652 276.86,263.652 277.622,264.414 U13.16@277.622,265.926 ; v2(273.939,292.29) 273.939,294.386 275.336,295.783 281.051,295.783 281.686,295.148 U15.10@281.686,293.255 v2(281.686,292.227) ; U13.16@277.622,265.949 277.668,265.996 280.65,265.996 v2(280.67,266.016) ; v1(358.14,265.557) 358.14,264.125 358.491,263.774 363.342,263.774 ; U12.10@363.728,265.926 363.728,264.16 363.342,263.774 ; v2(366.268,292.227) U16.16@366.268,293.255 366.268,294.386 367.665,295.783 373.253,295.783 373.888,295.148 U16.10@373.888,293.255 v2(373.888,292.227) ; v2(373.761,265.938) 373.755,265.932 371.348,265.932 371.348,265.226 370.978,264.856 370.978,264.853 369.898,263.774 363.342,263.774
  Top Layer w1: v1(199.39,291.084) 200.668,292.362 200.668,293.895 C2.1@201.168,294.395 C1.1@212.471,294.395 212.719,294.643 R8.2@219.202,294.643
  Bottom Layer w0.5: v2(197.866,269.322) 198,269.456 198,269.696 199.136,270.832 U8.10@199.136,271.532 ; U8.16@206.756,271.532 206.756,270.002 208.362,268.396 208.616,268.396 v1(209.55,267.462) 209.685,267.462 210.32,268.097 212.852,268.097 215.265,265.684 225.044,265.684 225.933,264.795 244.983,264.795 ; v1(219.329,295.783) 220.472,295.783 222.504,297.815 229.362,297.815 238.973,288.204 272.583,288.204 274.047,289.668 274.047,290.805 U9.16@274.066,290.824 274.047,290.843 274.047,292.047 273.939,292.155 v2(273.939,292.29) 273.833,292.29 273.261,292.862 268.481,292.862 R22.1@268.097,292.478 ; v1(244.983,270.129) 244.983,264.795 ; v1(259.969,272.415) 267.716,272.415 267.779,272.351 ; R13.1@269.621,275.082 269.352,274.813 269.352,273.924 267.779,272.351 ; v2(269.945,266.859) 269.929,266.843 269.002,266.843 266.954,264.795 265.176,264.795 ; v2@269.983,266.898 269.983,270.116 U6.10@270.002,270.135 ; U6.16@277.622,270.135 277.622,268.605 280.078,266.149 280.536,266.149 v2(280.67,266.016) ; U9.10@281.686,290.824 v2(281.686,292.227) ; v2(373.888,292.227) 373.933,292.272 373.933,292.95 374.226,293.243 382.651,293.243 389.015,286.879 R9.1@395.389,286.879 ; 244.983,264.795 265.176,264.795 ; 265.176,264.795 264.795,265.176 264.795,269.367 267.779,272.351
  Bottom Layer w0.6: R15.1@198.882,276.349 198.8,276.431 196.898,276.431 194.818,278.511 194.818,290.068 195.467,290.717 U3.3@198.178,290.717 U3.3@199.023,290.717 ; U8.10@199.136,271.532 R15.1@199.136,276.095 ; v1(199.39,291.084) U3.3@199.023,290.717 ; U3.3@199.63,290.717 U3.3@199.023,290.717 ; v2(280.67,266.016) 280.785,266.13 280.785,267.196 281.178,267.589 299.212,267.589 301.752,265.049 319.278,265.049 322.58,261.747 326.771,261.747 330.327,265.303 357.632,265.303 358.14,265.811 358.14,271.145 361.928,274.933 363.074,274.933 R11.1@363.22,275.079 363.22,272.796 363.728,272.288 U2.10@363.728,270.135 ; R28.1@361.442,292.478 361.826,292.862 365.525,292.862 366.16,292.227 v2(366.268,292.227) ; v2(373.761,265.938) 373.761,270.135
  Bottom Layer w1: C3.2@191.646,294.259 191.946,293.959 191.946,293.159 193.04,292.065 J1.1@193.04,290.703 193.054,290.717 195.467,290.717 ; U2.16@371.348,270.135 373.761,270.135 394.211,270.135 R4.1@395.475,271.399 395.475,268.81 396.061,268.224 408.574,268.224 409.446,269.097 409.446,269.459 409.829,269.842 J2.4@409.829,270.383 ; R9.1@395.389,286.879 395.432,286.836 R4.1@395.432,271.442